# Altium PCB Routed BOARD 2.pcbdoc (part 2 of 2)
Units mil, origin at the board's own origin, x right, y up, seen from the top; angles counter-clockwise.
Board outline 6425 x 5035 mil, 2 copper layers (TopLayer, BottomLayer); 106 components, 189 nets, 1082 pads, 226 vias.
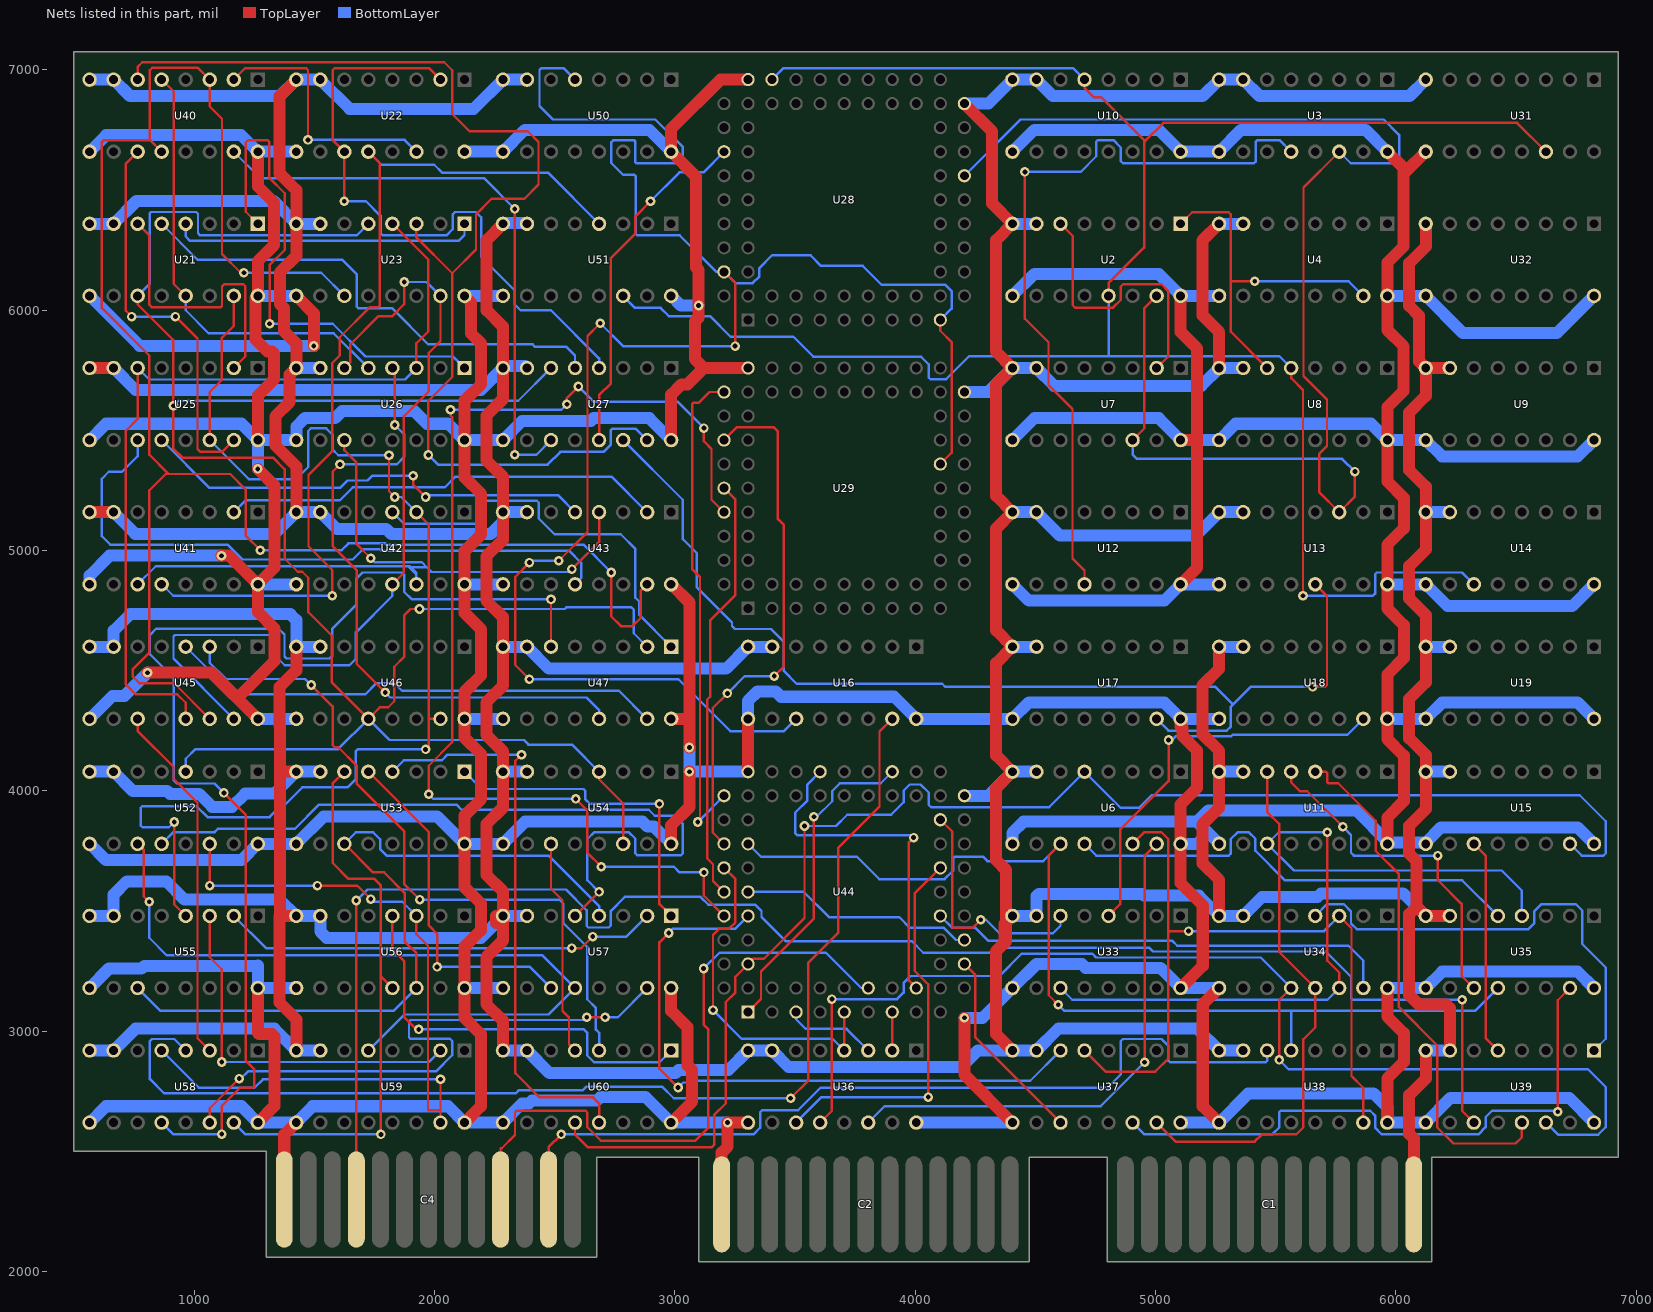
[diagram p2: the nets of this part, all layers, seen from the top]

## Via types
v1: diameter 40, hole 20, TopLayer to BottomLayer, 226 vias

## Nets (pads, with @x,y where several pads share a name; then routed paths per layer and width w, separated by ;. In a path a pad name is that pad's centre, name@x,y a point inside that pad or via, vN(x,y) a via of type N, cw(c..) or ccw(c..) an arc to the next point about the centre after c; other vN are vias at no path point) (continued)
$$$BCBFJ: U26.9 U41.9 U42.12 U43.4 | length 3055
  TopLayer w10: U26.9@1625,5460 1625,5418 1674,5369 1674,5029 v1(1735,4968) ; v1(2572,4923) 2685,5036 U43.4@2685,5160
  BottomLayer w10: U41.9@765,4860 840,4935 1898,4935 1902,4931 ; v1(1735,4968) 1751,4952 1947,4952 1968,4931 ; 1894.05,4930.95 1925,4900 ; 1894.05,4931 1902,4931 ; U42.12@1925,4860 1925,4900 ; v1(2572,4923) 2560,4911 1988,4911 1968,4931 ; 1902,4931 1968,4931 ; 1902,4931 1925,4908 1925,4900
$$$BCJFD: U53.9 U55.9 U56.12 U57.4 | length 3262.6
  TopLayer w10: U53.9@1625,3780 1744,3661 1791,3661 1876,3576 1876,3374 1925,3325 U56.12@1925,3180
  BottomLayer w10: U55.9@765,3180 860,3085 1830,3085 U56.12@1925,3180 ; U53.9@1625,3780 1673,3828 1745,3828 1774,3799 1774,3758 1801,3731 2475,3731 2685,3521 U57.4@2685,3480
$$$BDDHF: U34.10 U36.10 U39.12 | length 4781.3
  TopLayer w10: U36.10@3605,2620 3654,2669 v1(3654,3134) ; v1(5515,2881) 5515,3130 U34.10@5565,3180
  BottomLayer w10: v1(3654,3134) 3925,3134 3952,3161 3952,3201 3981,3230 4351,3230 4444,3323 4737,3323 4753,3307 5438,3307 U34.10@5565,3180 ; v1(5515,2881) 5554,2842 6800,2842 6874,2768 6874,2601 6843,2570 6675,2570 U39.12@6625,2620
$$$BDEIJ: U25.10 U43.5 | length 1914.8
  TopLayer w10: v1(1911,5312) 1911,5275 v1(1963,5223)
  BottomLayer w10: U25.10@865,5460 1064,5261 1607,5261 1638,5292 1722,5292 1742,5312 v1(1911,5312) ; v1(1963,5223) 1971,5231 2514,5231 U43.5@2585,5160
$$$BDHEB: U55.2 U57.2 | length 1831
  TopLayer w10: v1(2571,3346) 2611,3346 v1(2659,3394)
  BottomLayer w10: U55.2@1165,3480 1299,3346 v1(2571,3346) ; v1(2659,3394) 2799,3394 U57.2@2885,3480
$$$BEBDJ: U23.13 U26.6 U42.11 U45.13 | length 3639.9
  TopLayer w10: U26.6@1625,5760 1650,5785 1650,5859 1767,5976 1825,5976 1874,6025 v1(1874,6118) ; U42.11@1825,4860 1873,4908 1873,5559 1976,5662 1976,5823 2025,5872 U23.13@2025,6060
  BottomLayer w10: U45.13@1165,4300 914,4551 914,4642 921,4649 1324,4649 1350,4623 1350,4550 1377,4523 1646,4523 1673,4550 1673,4660 1825,4812 U42.11@1825,4860 ; v1(1874,6118) 1967,6118 U23.13@2025,6060
$$$BGACF: U26.4 U47.11 | length 2679.9
  TopLayer w10: v1(1607,5359) 1576,5328 1576,5019 1676,4919 1676,4529 v1(1795,4410) ; U26.4@1825,5760 1835,5750 v1(1835,5523)
  BottomLayer w10: v1(1607,5359) 1843,5359 1874,5390 1874,5484 v1(1835,5523) ; v1(1795,4410) 1816,4389 2633,4389 2685,4337 U47.11@2685,4300
$$$BGGBC: U34.4 U39.1 | length 1930.1
  BottomLayer w10: U34.4@5665,3480 5714,3529 5784,3529 5814,3499 5814,3449 5838,3425 6552,3425 6576,3449 6576,3499 6606,3529 6749,3529 6776,3502 6776,3363 6874,3265 6874,2969 U39.1@6825,2920
$$$BHEJI: U34.13 U44.25 | length 1951
  BottomLayer w10: U44.25@4105,3480 4155,3430 4251,3430 4305,3376 5071,3376 5091,3356 5803,3356 5865,3294 U34.13@5865,3180
$$$BIABB: U35.13 U37.12 | length 2538.2
  TopLayer w10: v1(6674,2665) 6674,3129 U35.13@6725,3180
  BottomLayer w10: U37.12@4905,2620 4953,2572 5487,2572 5515,2600 5515,2663 5521,2669 5894,2669 5914,2649 5914,2599 5942,2571 6344,2571 6374,2601 6374,2642 6401,2669 6670,2669 v1(6674,2665)
$$$CAHGG: U11.6 U34.11 U37.13 | length 2250.7
  TopLayer w10: U37.13@5005,2620 5084,2541 5413,2541 5443,2571 5586,2571 5615,2600 5615,2966 5665,3016 U34.11@5665,3180 5515,3330 5515,3863 5465,3913 U11.6@5465,4080
$$$CBCHE: U53.1 U57.1 | length 1373.3
  TopLayer w10: v1(2936,3946) 2936,3529 U57.1@2985,3480
  BottomLayer w10: U53.1@2125,4080 2197,4008 2620,4008 2627,4001 2627,3966 2647,3946 v1(2936,3946)
$$$CGIGD: U23.3 U27.13 U40.6 | length 4856.4
  TopLayer w10: U40.6@765,6960 765,7013 784,7032 2041,7032 2074,6999 2074,6817 2146,6745 2388,6745 2433,6700 2433,6523 2374,6464 2238,6464 2173,6399 2173,6253 2074,6154 ; U23.3@1925,6360 1925,6303 2074,6154 ; v1(1975,5398) 1975,5624 2074,5723 2074,6154
  BottomLayer w10: v1(1975,5398) 2015,5358 2471,5358 2524,5411 2704,5411 2734,5441 2734,5502 2740,5508 2837,5508 U27.13@2885,5460
$$$CIDID: U55.3 U59.2 | length 1558.6
  TopLayer w10: U55.3@1065,3480 1065,3308 1115,3258 v1(1115,2872)
  BottomLayer w10: v1(1115,2872) 1977,2872 U59.2@2025,2920
$$$DAIED: U6.10 U35.5 | length 1989.9
  BottomLayer w10: U6.10@4705,3780 4754,3731 5305,3731 5313,3739 5313,3799 5343,3829 5388,3829 5416,3801 5416,3751 5539,3628 6277,3628 U35.5@6425,3480
$$$DCCJI: U25.9 U43.10 | length 2670.3
  BottomLayer w10: U25.9@765,5460 765,5393 700,5328 645,5328 616,5299 616,5060 651,5025 1139,5025 1201,4963 1660,4963 1703,5006 1773,5006 1779,5000 2560,5000 2611,4949 2611,4886 U43.10@2585,4860
$$$DFGAI: U42.4 U47.1 | length 1698.8
  BottomLayer w10: U42.4@1825,5160 1873,5112 2180,5112 2185,5117 2185,5182 2211,5208 2425,5208 2434,5199 2434,5134 2500,5068 2775,5068 2836,5007 2836,4804 2853,4787 2853,4732 U47.1@2985,4600
$$$DJABJ: U52.9 U57.10 U59.5 | length 3237.1
  TopLayer w10: U52.9@765,3780 790,3755 790,3562 v1(813,3539)
  BottomLayer w10: v1(813,3539) 813,3389 886,3316 2449,3316 U57.10@2585,3180 2475,3070 1875,3070 U59.5@1725,2920
$$$EABFC: U6.12 U34.3 U37.5 U38.13 | length 3143
  TopLayer w10: U37.5@4705,2920 4793,2832 4999,2832 5054,2887 5054,3411 ; U6.12@4905,3780 4954,3829 5024,3829 5054,3799 5054,3411 ; v1(5138,3417) 5060,3417 5054,3411 ; U34.3@5765,3480 5816,3429 5816,2814 5865,2765 U38.13@5865,2620
  BottomLayer w10: v1(5138,3417) 5702,3417 U34.3@5765,3480
$$$EAGCC: U6.13 U36.12 | length 2183.7
  TopLayer w10: v1(4955,2871) 4955,3730 U6.13@5005,3780
  BottomLayer w10: U36.12@3805,2620 3873,2688 4772,2688 v1(4955,2871)
$$$EDCCF: U21.6 U25.2 | length 1212.1
  TopLayer w10: U21.6@765,6360 814,6311 814,6023 825,6012 1110,6012 1116,6018 1116,6099 1126,6109 1204,6109 1213,6100 1213,5808 U25.2@1165,5760
$$$EEFFB: U21.5 U27.5 | length 2078.1
  BottomLayer w10: U21.5@865,6360 1015,6210 1617,6210 1676,6151 1676,6016 1683,6009 1823,6009 1974,5858 2409,5858 2419,5848 2549,5848 2585,5812 U27.5@2585,5760
$$$EJDID: U45.9 U58.3 | length 1504.3
  TopLayer w10: U45.9@765,4300 765,4250 914,4101 914,4051 1014,3951 1014,2971 U58.3@1065,2920
$$$FBEJC: U53.4 U60.11 | length 2383.4
  TopLayer w10: v1(2362,4151) 2336,4125 2336,2826 2437,2725 2660,2725 2685,2700 U60.11@2685,2620
  BottomLayer w10: U53.4@1825,4080 1873,4128 2031,4128 2054,4151 v1(2362,4151)
$$$FCEDE: U44.1 U44.39 | length 1355.1
  TopLayer w10: U44.1@3305,3080 3359,3134 3359,3249 3579,3469 v1(3579,3893)
  BottomLayer w10: v1(3579,3893) 3591,3893 3655,3957 3655,4000 3687,4032 3857,4032 U44.39@3905,4080
$$$FDEBH: U37.9 U44.20 | length 825.7
  TopLayer w10: U44.20@4205,3280 4251,3234 4251,2974 U37.9@4605,2620
$$$FEBDG: U36.9 U44.29 | length 1615.8
  TopLayer w10: v1(4055,2726) 4055,3195 3998,3252 3998,3573 U44.29@4105,3680
  BottomLayer w10: U36.9@3505,2620 3611,2726 v1(4055,2726)
$$$FEIEE: U21.1 U26.1 | length 2160
  TopLayer w10: U21.1@1265,6360 1215,6410 1215,6698 1225,6708 1305,6708 1313,6700 1313,6551 1377,6487 1377,6251 1314,6188 v1(1314,5944)
  BottomLayer w10: v1(1314,5944) 1577,5944 1713,5808 2077,5808 U26.1@2125,5760
$$$FFCEC: U57.13 U58.12 | length 2519.7
  TopLayer w10: U58.12@1065,2620 1065,2680 v1(1188,2803) ; v1(2634,3058) v1(2710,3058)
  BottomLayer w10: v1(1188,2803) 1194,2803 1224,2833 2006,2833 2074,2901 2074,2959 2064,2969 1899,2969 1894,2974 1894,3040 1901,3047 2623,3047 v1(2634,3058) ; v1(2710,3058) 2763,3058 U57.13@2885,3180
$$$FGBCC: U37.6 U44.63 | length 2705.7
  TopLayer w10: v1(2975,3409) 2936,3370 2936,2844 v1(3014,2766)
  BottomLayer w10: v1(2975,3409) 2993,3427 3252,3427 U44.63@3305,3480 ; v1(3014,2766) 3035,2787 3089,2787 3096,2794 4479,2794 U37.6@4605,2920
$$$FGBCD: U33.6 U44.33 | length 1008.9
  TopLayer w10: U44.33@4105,3880 4155,3830 4155,3435 4160,3430 4239,3430 v1(4273,3464)
  BottomLayer w10: v1(4273,3464) 4295,3464 4351,3408 4574,3408 4605,3439 U33.6@4605,3480
$$$FIBII: U53.6 U56.11 U58.13 | length 2375.4
  TopLayer w10: U53.6@1625,4080 1576,4031 1576,3701 1643,3634 1750,3634 1776,3608 1776,3229 1777,3228 ; v1(1777,2571) 1777,3228 ; U56.11@1825,3180 1777,3228
  BottomLayer w10: U58.13@1165,2620 1214,2571 v1(1777,2571)
$$$FJAFH: U21.4 U23.1 | length 1276.8
  BottomLayer w10: U21.4@965,6360 965,6307 983,6289 2100,6289 2125,6314 U23.1@2125,6360
$$$FJIDJ: U36.4 U44.9 U44.58 | length 1449
  TopLayer w10: v1(3159,3088) 3159,3400 3186,3427 3226,3427 3252,3453 3252,3633 U44.58@3205,3680 ; U36.4@3705,2920 U44.9@3705,3080
  BottomLayer w10: v1(3159,3088) 3278,2969 3656,2969 U36.4@3705,2920
$$$GAGIB: U52.12 U56.3 U58.5 U59.13 | length 3384.8
  TopLayer w10: v1(1065,3606) U52.12@1065,3780 ; v1(1513,3606) 1679,3606 v1(1735,3550) ; U56.3@1925,3480 1925,3404 1973,3356 1973,2672 2025,2672 ; U59.13@2025,2620 2025,2672 ; v1(2025,2800) 2025,2672
  BottomLayer w10: U58.5@865,2920 1020,2765 1251,2765 1286,2800 v1(2025,2800) ; v1(1065,3606) v1(1513,3606) ; v1(1735,3550) 1746,3539 1866,3539 U56.3@1925,3480
$$$GEDBF: U52.10 U57.5 | length 3261.9
  TopLayer w10: U57.5@2585,3480 v1(2685,3580)
  BottomLayer w10: U52.10@865,3780 914,3829 1085,3829 1098,3842 1419,3842 1520,3943 2092,3943 2113,3922 2892,3922 2917,3897 3000,3897 3034,3863 3034,3741 3025,3732 2845,3732 2836,3741 2836,3801 2808,3829 2666,3829 2636,3799 2636,3629 v1(2685,3580)
$$$GEECJ: C4.19 U44.12 | length 2751.2
  TopLayer w10: C4.19@2275,2300 2275,2513 2280,2513 2335,2568 2335,2663 2341,2669 2629,2669 2636,2662 2636,2601 2692,2545 3086,2545 3140,2599 3140,3008 3120,3028 v1(3120,3261)
  BottomLayer w10: v1(3120,3261) 3186,3327 3629,3327 3776,3180 U44.12@3805,3180
$$$GGBFA: U11.5 U35.9 | length 1437.4
  TopLayer w10: U11.5@5565,4080 5565,4035 5601,3999 5632,3999 v1(5780,3851) ; v1(6175,3731) 6175,3629 6274,3530 6274,3231 U35.9@6325,3180
  BottomLayer w10: v1(5780,3851) 5814,3817 5814,3743 5826,3731 v1(6175,3731)
$$$GGEHJ: U21.11 U26.5 U40.5 | length 1860.8
  TopLayer w10: U40.5@865,6960 915,6910 915,6110 U21.11@965,6060
  BottomLayer w10: U21.11@965,6060 965,6000 1061,5904 1581,5904 U26.5@1725,5760
$$$GHCAI: U56.4 U60.1 | length 1706.1
  TopLayer w10: U56.4@1825,3480 1825,3341 1875,3291 1875,3058 1925,3008 v1(1935,3008)
  BottomLayer w10: v1(1935,3008) 2622,3008 2635,2995 2635,2900 2664,2871 2936,2871 U60.1@2985,2920
$$$HAFJG: U15.9 U39.5 | length 901.4
  TopLayer w10: U15.9@6325,3780 6375,3730 6375,2970 U39.5@6425,2920
$$$HBAEF: U36.2 U44.13 | length 160
  TopLayer w10: U36.2@3905,2920 U44.13@3905,3080
$$$HBEHJ: U44.16 U44.45 | length 1446.1
  TopLayer w10: v1(3994,3806) 3974,3786 3974,3211 U44.16@4005,3180
  BottomLayer w10: U44.45@3605,4080 3552,4027 3552,3960 3501,3909 3501,3825 3511,3815 3985,3815 v1(3994,3806)
$$$HBFJD: U41.2 U43.2 | length 1842.6
  BottomLayer w10: U41.2@1165,5160 1214,5209 1606,5209 1660,5263 2043,5263 2088,5308 2737,5308 U43.2@2885,5160
$$$HBJHI: U6.9 U35.10 U38.5 U44.57 | length 4218
  TopLayer w10: v1(4596,3110) 4556,3150 4556,3731 U6.9@4605,3780
  BottomLayer w10: U44.57@3305,3780 3359,3726 3758,3726 3851,3633 4123,3633 4158,3668 4158,3719 4166,3727 4282,3727 4301,3708 4533,3708 U6.9@4605,3780 ; v1(4596,3110) 4621,3085 5565,3085 ; U38.5@5565,2920 5565,3085 ; U35.10@6425,3180 6330,3085 5565,3085
$$$HECHG: C4.7 U39.9 | length 6847.3
  TopLayer w10: C4.7@1675,2300 v1(1675,3544) ; v1(6276,3131) 6276,2669 U39.9@6325,2620
  BottomLayer w10: v1(1675,3544) 1721,3590 2547,3590 2634,3503 2634,3438 2640,3432 2725,3432 2734,3441 2734,3501 2792,3559 3107,3559 3139,3527 3334,3527 3361,3500 3361,3475 3461,3375 3986,3375 4034,3327 4309,3327 4329,3347 4975,3347 4990,3332 5709,3332 5814,3227 5814,3138 5821,3131 v1(6276,3131)
$$$HJJIF: U45.3 U60.4 | length 2892.9
  TopLayer w10: v1(1487,4441) 1576,4352 1576,4191 1585,4182 1600,4182 1676,4106 1676,4031 1874,3833 1874,3613 v1(1939,3548)
  BottomLayer w10: U45.3@1065,4600 1065,4533 1132,4466 1462,4466 v1(1487,4441) ; v1(1939,3548) 2519,3548 2536,3531 2536,3451 2636,3351 2636,3133 2672,3097 2672,3007 2685,2994 U60.4@2685,2920
$$$ICCJI: U47.6 U58.10 | length 5054.4
  TopLayer w10: v1(1115,2572) 1115,2689 1191,2765 1246,2765 1251,2770 1251,2841 1214,2878 1214,3902 v1(1124,3992) ; U47.6@2485,4600 v1(2485,4797)
  BottomLayer w10: U58.10@865,2620 914,2571 1114,2571 v1(1115,2572) ; v1(1124,3992) 1085,4031 929,4031 916,4044 916,4469 816,4569 816,4649 842,4675 1352,4675 1376,4651 1376,4560 1385,4551 1564,4551 1574,4561 1574,4674 1674,4774 1674,4882 1701,4909 1864,4909 1874,4899 1874,4829 1906,4797 v1(2485,4797)
$$$IDHGA: U53.5 U57.9 | length 1440.9
  TopLayer w10: U53.5@1725,4080 1977,3828 1977,3440 2011,3406 v1(2011,3268)
  BottomLayer w10: v1(2011,3268) 2397,3268 U57.9@2485,3180
$$$IEHDA: U44.22 U44.61 | length 982.8
  BottomLayer w10: U44.61@3305,3580 3537,3580 3642,3475 3934,3475 3979,3430 4120,3430 4170,3380 U44.22@4205,3380
$$$IFBFJ: U23.9 U40.3 U40.10 U43.13 U45.12 | length 7600
  TopLayer w10: U40.10@865,6660 817,6708 816,6708 ; U45.12@1065,4300 917,4448 772,4448 745,4475 745,4507 814,4576 814,5251 882,5319 894,5319 ; v1(1207,6156) 1194,6156 1116,6234 1116,6797 1065,6848 U40.3@1065,6960 1016,7009 826,7009 816,6999 816,6708 ; v1(1275,5002) 1214,5063 1214,5255 1150,5319 894,5319 ; v1(2736,4909) 2736,4726 2776,4686 2824,4686 2859,4721 2859,4834 U43.13@2885,4860 ; 816,6708 625,6708 616,6699 616,6009 814,5811 814,5399 894,5319
  BottomLayer w10: v1(1207,6156) 1529,6156 U23.9@1625,6060 ; v1(1275,5002) 1614,5002 1642,5030 1795,5030 1800,5025 2620,5025 v1(2736,4909)
$$$IFGFD: U36.3 U44.5 | length 383.8
  BottomLayer w10: U44.5@3505,3080 3505,3050 3545,3010 3715,3010 U36.3@3805,2920
$$$IHIFF: U11.4 U39.11 | length 2192.3
  TopLayer w10: U11.4@5665,4080 5710,4080 5715,4075 5715,4037 5720,4032 5761,4032 5917,3876 5917,3750 6013,3654 6013,3101 6173,2941 6173,2600 6240,2533 6499,2533 6525,2559 U39.11@6525,2620
$$$JAAAJ: U25.13 U40.9 | length 1663.6
  TopLayer w10: v1(740,5974) 716,5998 716,6611 U40.9@765,6660 ; v1(922,5974) 1014,5882 1014,5423 1026,5411 1116,5411 U25.13@1165,5460
  BottomLayer w10: v1(740,5974) v1(922,5974)
$$$JADED: U11.9 U33.9 U34.12 U35.4 | length 3385
  TopLayer w10: v1(5715,3828) 5715,3294 5765,3244 U34.12@5765,3180
  BottomLayer w10: U33.9@4605,3180 4654,3131 5716,3131 U34.12@5765,3180 ; v1(5715,3828) 5513,3828 U11.9@5465,3780 5576,3669 6441,3669 6525,3585 U35.4@6525,3480
$$$JBGJA: U22.10 U41.10 U51.4 | length 3866.6
  TopLayer w10: v1(1575,4812) 1575,4919 1476,5018 1476,5315 1574,5413 1574,5780 1606,5812 1606,5888 1730,6012 1765,6012 1773,6020 1773,6612 U22.10@1725,6660
  BottomLayer w10: U41.10@865,4860 913,4812 v1(1575,4812) ; U22.10@1725,6660 1779,6606 1999,6606 2032,6573 2472,6573 U51.4@2685,6360
$$$JGABC: U54.9 U60.5 | length 901.4
  TopLayer w10: U54.9@2485,3780 2485,3593 2533,3545 2533,3085 2560,3058 2560,2945 U60.5@2585,2920
$$$JHDFD: C4.23 U38.6 | length 3635.3
  TopLayer w10: C4.23@2475,2300 2475,2518 v1(2528,2571)
  BottomLayer w10: v1(2528,2571) 3328,2571 3356,2599 3356,2664 3364,2672 3514,2672 3607,2765 4801,2765 4856,2820 4856,2959 4865,2968 5025,2968 5054,2939 5054,2878 5061,2871 5459,2871 5465,2877 U38.6@5465,2920
$$$JJFCI: U27.9 U40.13 | length 2466.8
  TopLayer w10: v1(2334,5399) v1(2334,6422)
  BottomLayer w10: U40.13@1165,6660 1275,6550 2206,6550 v1(2334,6422) ; v1(2334,5399) 2424,5399 U27.9@2485,5460
CD: U27.11 U28.56 | length 1474
  TopLayer w10: U27.11@2685,5460 2685,5647 2734,5696 2734,6217 2836,6319 2836,6391 v1(2899,6454)
  BottomLayer w10: v1(2899,6454) 3019,6574 3119,6574 U28.56@3205,6660
E: U29.60 U44.60 | length 1776.9
  TopLayer w10: U44.60@3205,3580 3159,3626 3159,3695 3135,3719 3135,4380 3147,4392 3147,4710 3252,4815 3252,5213 U29.60@3205,5260
FR: U16.9 U28.17 U28.66 U29.29 U50.5 | length 8069.7
  TopLayer w10: v1(2395,4465) 2336,4524 2336,4891 v1(2395,4950) ; v1(2517,4958) 2637,5078 2637,5893 v1(2690,5946) ; U28.66@3205,6160 3252,6113 3252,5852 v1(3251,5851) ; U29.29@4105,5360 4152,5407 4152,5868 4105,5915 U28.17@4105,5960
  BottomLayer w10: v1(2395,4465) 3015,4465 3231,4249 3454,4249 U16.9@3505,4300 ; v1(2395,4950) 2403,4958 v1(2517,4958) ; U50.5@2585,6960 2537,7008 2445,7008 2437,7000 2437,6850 2493,6794 2919,6794 3034,6679 3034,6621 3025,6612 2840,6612 2835,6617 2835,6703 2830,6708 2745,6708 2736,6699 2736,6613 2785,6564 2832,6564 2837,6559 2837,6319 2844,6312 3021,6312 3173,6160 U28.66@3205,6160 3252,6113 3324,6113 3352,6141 3352,6176 3405,6229 3565,6229 3609,6185 3782,6185 3861,6106 4126,6106 4152,6080 4152,6007 U28.17@4105,5960 ; v1(2690,5946) 2785,5851 v1(3251,5851)
FW: U45.4 U47.13 | length 2083.2
  BottomLayer w10: U45.4@965,4600 1163,4402 1712,4402 1759,4449 1833,4449 1865,4417 2768,4417 U47.13@2885,4300
GND: C2.1 C4.1 C6.1 C7.1 C8.1 C10.1 C11.1 C12.1 C13.1 C14.1 C15.1 C16.1 C17.1 C18.1 C19.1 C20.1 C21.1 C22.1 C23.1 C26.1 C27.1 C28.1 C29.1 C30.1 C31.1 C32.1 C33.1 C34.1 C35.1 C36.1 C37.1 C38.1 C39.1 C40.1 C41.1 C42.1 C43.1 C48.1 C49.1 C55.1 C57.1 C58.1 C59.1 C60.1 C64.1 C66.1 C67.1 C68.1 C69.1 C70.1 C72.1 C73.1 U2.14 U3.14 U4.14 U6.14 U7.14 U8.14 U9.14 U10.14 U11.14 U12.14 U13.14 U14.14 U15.14 U16.14 U17.14 U18.14 U19.14 U21.14 U22.14 U23.14 U25.14 U26.14 U27.14 U28.51 U29.51 U32.14 U33.14 U34.14 U35.14 U36.14 U37.14 U38.14 U39.14 U40.14 U41.14 U42.14 U43.14 U44.51 U45.14 U46.14 U47.14 U50.14 U51.14 U52.14 U53.14 U54.14 U55.14 U56.14 U57.14 U58.14 U59.14 U60.14 | length 53456
  TopLayer w50: v1(806,4492) 807,4493 1072,4493 U45.14@1265,4300 ; v1(1114,4979) 1146,4979 U41.14@1265,4860 ; 1179.5,4385.5 1334,4540 1334,4676 1265,4745 U41.14@1265,4860 ; U58.14@1265,2620 1334,2689 1334,2979 1325,2988 1270,2988 1265,2993 U55.14@1265,3180 ; v1(1265,5340) 1334,5271 1334,4929 U41.14@1265,4860 ; U25.14@1265,5460 1265,5645 1333,5713 1333,5820 1325,5828 1306,5828 1256,5878 1256,6051 U21.14@1265,6060 1265,6204 1333,6272 1333,6448 1265,6516 U40.14@1265,6660 ; C4.1@1375,2300 1375,2570 C35.1@1425,2620 ; C22.1@1425,6060 1498,5987 v1(1498,5852) ; U59.14@2125,2620 2193,2688 2193,2988 2125,3056 U56.14@2125,3180 2125,3352 2193,3420 2193,3532 2125,3600 U53.14@2125,3780 2125,3897 2194,3966 2194,4153 2125,4222 U46.14@2125,4300 2125,4412 2194,4481 2194,4672 2125,4741 U42.14@2125,4860 2125,4998 2194,5067 2194,5236 2125,5305 U26.14@2125,5460 2125,5624 2194,5693 2194,5862 2153,5903 2153,6032 U23.14@2125,6060 ; U60.14@2985,2620 3072,2707 3072,2839 3053,2858 3053,3017 2985,3085 U57.14@2985,3180 ; U54.14@2985,3780 2985,3857 3061,3933 v1(3061,4080) ; U47.14@2985,4300 3061,4300 ; U43.14@2985,4860 3061,4784 v1(3061,4181) ; U27.14@2985,5460 2985,5649 3028,5692 3053,5692 3121,5760 ; v1(3099,6020) 3099,5969 3084,5954 3084,5797 3121,5760 ; v1(3099,6021) 3099,6168 3088,6179 3088,6557 U50.14@2985,6660 2985,6755 3190,6960 U28.51@3305,6960 ; C2.1@3195,2280 3195,2495 3220,2520 v1(3220,2620) C10.1@3305,2620 ; U44.51@3305,4080 C48.1@3305,4300 ; U29.51@3305,5760 3121,5760 ; v1(4205,3056) 4205,2820 C13.1@4405,2620 ; U33.14@5105,3180 5197,3272 5197,3524 5105,3616 U6.14@5105,3780 5105,3944 5174,4013 5174,4168 5113,4229 5113,4261 5105,4269 U17.14@5105,4300 ; U12.14@5105,4860 5174,4929 5174,5460 ; U7.14@5105,5460 5174,5460 ; U2.14@5105,6060 5105,5910 5174,5841 5174,5460 ; C11.1@5265,2620 5197,2688 5197,3112 C17.1@5265,3180 ; U38.14@5965,2620 5965,2804 6034,2873 6034,2992 5965,3061 U34.14@5965,3180 ; U11.14@5965,3780 5965,3889 6034,3958 6034,4147 5965,4216 U18.14@5965,4300 5965,4484 6034,4553 6034,4690 5965,4759 U13.14@5965,4860 5965,5024 6034,5093 6034,5219 5965,5288 U8.14@5965,5460 5965,5597 6033,5665 6033,5850 5965,5918 U4.14@5965,6060 5965,6198 6033,6266 6033,6592 ; U3.14@5965,6660 6033,6592 ; C72.1@6125,6660 6045,6580 6033,6592
  BottomLayer w50: C37.1@565,2620 633,2688 1197,2688 U58.14@1265,2620 C35.1@1425,2620 1493,2688 2057,2688 U59.14@2125,2620 C40.1@2285,2620 2365,2700 2394,2700 2405,2711 2675,2711 2690,2726 2879,2726 U60.14@2985,2620 v1(3220,2620) ; C38.1@565,3180 646,3261 782,3261 793,3272 1265,3272 ; C39.1@565,3780 633,3712 1197,3712 U52.14@1265,3780 C36.1@1425,3780 1539,3894 2011,3894 U53.14@2125,3780 C34.1@2285,3780 2377,3872 2866,3872 2886,3852 2913,3852 U54.14@2985,3780 ; C20.1@565,4300 661,4396 710,4396 v1(806,4492) ; C27.1@565,4860 565,4896 648,4979 v1(1114,4979) ; C28.1@565,5460 633,5528 1197,5528 U25.14@1265,5460 ; C21.1@565,6060 773,5852 v1(1498,5852) ; C26.1@565,6660 634,6729 1196,6729 U40.14@1265,6660 ; U40.14@1260,6660 C33.1@1425,6660 ; 1264,3272 1265,3273 U55.14@1265,3180 C41.1@1425,3180 ; U45.14@1265,4300 C7.1@1425,4300 ; U41.14@1265,4860 C30.1@1425,4860 ; v1(1265,5340) U25.14@1265,5460 ; U21.14@1265,6060 C22.1@1425,6060 ; U23.14@2120,6060 C23.1@2285,6060 ; U56.14@2125,3180 C43.1@2285,3180 ; U46.14@2125,4300 C29.1@2285,4300 ; U42.14@2125,4860 C31.1@2285,4860 ; U22.14@2125,6660 C32.1@2285,6660 2376,6751 2894,6751 U50.14@2985,6660 ; U27.14@2985,5460 2894,5551 2662,5551 2651,5540 2365,5540 C6.1@2285,5460 U26.14@2125,5460 2057,5528 1969,5528 1916,5581 1616,5581 1587,5552 1461,5552 1425,5516 C19.1@1425,5460 U25.14@1265,5460 ; U51.14@2985,6060 3025,6020 v1(3099,6020) 3098,6021 v1(3099,6021) ; v1@3061,4182 v1(3061,4080) U44.51@3305,4080 ; C48.1@3305,4300 3305,4375 3344,4414 3420,4414 3442,4392 3913,4392 U16.14@4005,4300 C57.1@4405,4300 4473,4368 5037,4368 U17.14@5105,4300 C49.1@5265,4300 ; U36.14@4005,2620 C13.1@4405,2620 ; v1(4205,3056) 4281,3056 C14.1@4405,3180 4505,3280 4694,3280 4710,3264 5021,3264 U33.14@5105,3180 C17.1@5265,3180 ; C15.1@4405,3780 4405,3826 4451,3872 5173,3872 ; C66.1@4405,4860 4473,4792 5037,4792 U12.14@5105,4860 C69.1@5265,4860 ; C67.1@4405,5460 4496,5551 5014,5551 U7.14@5105,5460 C55.1@5265,5460 5333,5528 5897,5528 U8.14@5965,5460 C42.1@6125,5460 6193,5392 6757,5392 U9.14@6825,5460 ; C58.1@4405,6060 4496,6151 5014,6151 U2.14@5105,6060 C59.1@5265,6060 ; C64.1@4405,6660 4496,6751 5014,6751 U10.14@5105,6660 C73.1@5265,6660 5356,6751 5874,6751 U3.14@5965,6660 ; U37.14@5105,2620 C11.1@5265,2620 5386,2741 5908,2741 5965,2684 U38.14@5965,2620 C16.1@6125,2620 6228,2723 6722,2723 U39.14@6825,2620 ; U6.14@5105,3780 5174,3780 5219.5,3825.5 ; C12.1@5265,3780 5173,3872 ; U34.14@5965,3180 C18.1@6125,3180 6193,3248 6757,3248 U35.14@6825,3180 ; U18.14@5965,4300 C68.1@6125,4300 6193,4368 6757,4368 U19.14@6825,4300 ; U13.14@5965,4860 C70.1@6125,4860 6216,4769 6734,4769 U14.14@6825,4860 ; U4.14@5965,6060 C60.1@6125,6060 6280,5905 6670,5905 U32.14@6825,6060 ; U15.14@6825,3780 6757,3848 6188,3848 6125,3785 5970,3785 5836,3919 5220,3919 5173,3872
GT: U22.12 U40.2 | length 1093.9
  TopLayer w10: U40.2@1165,6960 1213,7008 1465,7008 1474,6999 v1(1474,6709)
  BottomLayer w10: v1(1474,6709) 1876,6709 U22.12@1925,6660
GY: U21.9 U23.5 U27.6 U46.10 U47.2 U52.4 U54.4 U54.12 | length 9622.9
  TopLayer w10: U21.9@765,6060 765,6025 913,5877 ; v1(914,5603) 914,5876 913,5877 ; v1(1938,4757) 1900,4757 1875,4732 1875,4559 1833,4517 1833,4373 1808,4348 1773,4348 U46.10@1725,4300 1573,4452 1573,4646 1475,4744 1475,4887 1450,4912 1431,4912 1377,4966 1377,5338 1328,5387 951,5387 913,5425 913,5603 913,5877 ; U54.4@2685,4080 2685,4049 2785,3949 U54.12@2785,3780
  BottomLayer w10: U21.9@765,6060 815,6110 815,6403 821,6409 1009,6409 1016,6402 1016,6321 1025,6312 1677,6312 U23.5@1725,6360 ; v1(914,5603) 935,5624 2349,5624 U27.6@2485,5760 ; U52.4@965,4080 965,4134 1005,4174 1599,4174 U46.10@1725,4300 1813,4212 2372,4212 2391,4193 2572,4193 U54.4@2685,4080 ; v1(1938,4757) 2542,4757 2549,4764 2820,4764 2829,4755 2829,4656 U47.2@2885,4600
HY: U18.13 U33.4 | length 1682
  TopLayer w10: U33.4@4805,3480 4854,3529 4854,3840 5055,4041 v1(5055,4212)
  BottomLayer w10: v1(5055,4212) 5070,4212 5086,4228 5315,4228 5321,4234 5799,4234 U18.13@5865,4300
IU: U6.5 U15.13 U44.67 U60.10 | length 6160.8
  TopLayer w10: U60.10@2585,2620 2585,2571 2639,2517 3153,2517 3165,2529 3165,2653 3212,2700 3212,3122 3252,3162 3252,3227 3327,3302 3371,3302 3540,3471 v1(3540,3854)
  BottomLayer w10: v1(3540,3854) 3671,3854 3718,3901 3900,3901 3952,3953 3952,4001 3978,4027 4023,4027 4057,3993 4057,3942 4066,3933 4558,3933 U6.5@4705,4080 4855,3930 4932,3930 4984,3982 6766,3982 6874,3874 6874,3741 6864,3731 6774,3731 U15.13@6725,3780
L: U29.52 U44.52 | length 2064.3
  TopLayer w10: v1(3096,3871) 3105,3880 3105,4890 3072,4923 3072,5610 3077,5615 3099,5615 3144,5660 U29.52@3205,5660
  BottomLayer w10: v1(3096,3871) U44.52@3205,3980
NH: U3.10 U12.10 | length 3196.8
  TopLayer w10: v1(4457,6576) 4457,5965 4555,5867 4555,5689 4655,5589 4655,4967 4705,4917 U12.10@4705,4860
  BottomLayer w10: v1(4457,6576) 4689,6576 4754,6641 4754,6702 4760,6708 4825,6708 4856,6677 4856,6621 4865,6612 5410,6612 5417,6619 5417,6700 5425,6708 5517,6708 U3.10@5565,6660
OI: U2.13 U3.12 U7.12 U13.3 U28.28 | length 5816.6
  TopLayer w10: U7.12@4905,5460 4954,5509 4954,6009 U2.13@5005,6060 ; U3.12@5765,6660 5616,6511 5616,5727 5714,5629 5714,5435 5681,5402 5681,5244 U13.3@5765,5160 5830,5225 v1(5830,5329)
  BottomLayer w10: U28.28@4205,6560 4439,6794 5950,6794 6014,6730 6014,6621 6005,6612 5813,6612 U3.12@5765,6660 ; U7.12@4905,5460 4905,5400 4923,5382 5777,5382 v1(5830,5329)
P: U2.11 U8.5 U10.5 U14.9 U28.49 U31.12 U51.12 | length 9228.7
  TopLayer w10: U10.5@4705,6960 4705,6925 4743,6887 4774,6887 4957,6704 ; U2.11@4805,6060 4805,6113 4953,6261 4953,6700 4957,6704 ; U8.5@5565,5760 5565,5718 5614,5669 v1(5614,4812) ; U31.12@6625,6660 6505,6780 5033,6780 4957,6704
  BottomLayer w10: U51.12@2785,6060 2835,6010 2941,6010 2975,5976 3146,5976 3232,5890 3494,5890 3577,5807 4025,5807 4057,5775 4057,5720 4064,5713 4129,5713 4225,5809 4805,5809 ; U28.49@3405,6960 3453,7008 4657,7008 U10.5@4705,6960 ; U2.11@4805,6060 4805,5809 ; U8.5@5565,5760 5516,5809 4805,5809 ; v1(5614,4812) 5905,4812 5914,4821 5914,4902 5921,4909 6276,4909 U14.9@6325,4860
Q: U29.56 U44.56 | length 2194.3
  TopLayer w10: U44.56@3205,3780 3158,3827 3158,4345 v1(3219,4406) ; U29.56@3205,5460 3259,5514 3411,5514 3429,5496 3429,5131 3454,5106 3454,4518 v1(3414,4478)
  BottomLayer w10: v1(3219,4406) 3291,4478 v1(3414,4478)
SE: U22.2 U22.9 U27.4 | length 2697.7
  TopLayer w10: v1(1625,6454) U22.9@1625,6660 1576,6709 1576,6999 1585,7008 1977,7008 U22.2@2025,6960
  BottomLayer w10: v1(1625,6454) 1715,6454 1776,6393 1776,6321 1785,6312 2050,6312 2076,6338 2076,6399 2086,6409 2172,6409 2194,6387 2194,6223 2334,6083 2334,6024 2358,6000 2485,6000 2685,5800 U27.4@2685,5760
UH: U13.11 U17.13 U27.12 | length 4548.5
  TopLayer w10: v1(5654,4433) 5706,4433 5714,4441 5714,4811 U13.11@5665,4860
  BottomLayer w10: U27.12@2785,5460 3033,5212 3033,5048 3092,4989 3092,4847 3238,4701 3238,4686 3250,4674 3400,4674 3454,4620 3454,4499 3507,4446 4113,4446 4126,4433 5250,4433 5323,4360 ; U17.13@5005,4300 5054,4251 5297,4251 5314,4268 5314,4351 5323,4360 ; v1(5654,4433) 5396,4433 5323,4360
VCC: C1.25 C6.2 C7.2 C8.2 C10.2 C11.2 C12.2 C13.2 C14.2 C15.2 C16.2 C17.2 C18.2 C19.2 C20.2 C21.2 C22.2 C23.2 C26.2 C27.2 C28.2 C29.2 C30.2 C31.2 C32.2 C33.2 C34.2 C35.2 C36.2 C37.2 C38.2 C39.2 C40.2 C41.2 C42.2 C43.2 C48.2 C49.2 C55.2 C57.2 C58.2 C59.2 C60.2 C64.2 C66.2 C67.2 C68.2 C69.2 C70.2 C72.2 C73.2 U2.7 U3.7 U4.7 U6.7 U7.7 U8.7 U9.7 U10.7 U11.7 U12.7 U13.7 U14.7 U15.7 U16.7 U17.7 U18.7 U19.7 U21.7 U22.7 U23.7 U25.7 U26.7 U27.7 U28.34 U29.34 U33.7 U34.7 U35.7 U36.7 U37.7 U38.7 U39.7 U40.7 U41.7 U42.7 U43.7 U44.34 U45.7 U46.7 U47.7 U50.7 U51.7 U52.7 U53.7 U54.7 U55.7 U56.7 U57.7 U58.7 U59.7 U60.7 | length 43545.2
  TopLayer w50: C27.2@565,5160 U41.7@665,5160 ; C28.2@565,5760 U25.7@665,5760 ; 1356,4270 1356,4433 1425,4502 C7.2@1425,4600 ; 1357,4080 C36.2@1425,4080 ; 1357,4270 1357,3480 ; C35.2@1425,2920 1425,3050 1356,3119 1356,3479 1357,3480 ; C41.2@1425,3480 1357,3480 ; C30.2@1425,5160 1425,5351 1338,5438 1338,5559 1397,5618 1397,5732 C19.2@1425,5760 1425,5862 1373,5914 1373,6010 1357,6026 1357,6158 1425,6226 C22.2@1425,6360 1425,6500 1356,6569 1356,6891 C33.2@1425,6960 ; C40.2@2285,2920 2285,3044 2216,3113 2216,3309 2285,3378 C43.2@2285,3451 ; C23.2@2285,6360 2217,6292 2217,6000 2285,5932 C6.2@2285,5760 2285,5631 2216,5562 2216,5376 2285,5307 C31.2@2285,5160 2285,5045 2216,4976 2216,4792 2285,4723 C29.2@2285,4600 2285,4438 2216,4369 2216,4233 2285,4164 C34.2@2285,4080 2285,3931 2216,3862 2216,3651 2285,3582 C43.2@2285,3480 ; U28.34@4205,6860 4320,6745 4320,6445 C58.2@4405,6360 4337,6292 4337,5828 C67.2@4405,5760 4337,5692 4337,5228 C66.2@4405,5160 4337,5092 4337,4668 C57.2@4405,4600 4337,4532 4337,4148 C15.2@4405,4080 4337,4012 4337,3712 4378,3671 4378,3480 4378,3453 ; C13.2@4405,2920 4336,2989 4336,3332 4372,3368 ; C14.2@4405,3480 4378,3453 ; C17.2@5265,3480 5265,3630 5196,3699 5196,3861 5265,3930 C12.2@5265,4080 5265,4167 5196,4236 5196,4439 5265,4508 C49.2@5265,4600 ; C55.2@5265,5760 5265,5910 5196,5979 5196,6291 C59.2@5265,6360 ; C1.25@6075,2280 6075,2554 6056,2573 6056,2734 6125,2803 C16.2@6125,2920 ; C60.2@6125,6360 6125,6265 6056,6196 6056,6019 6097,5978 6097,5788 C42.2@6125,5760 ; U39.7@6225,2920 6225,3096 6209,3112 6095,3112 6056,3151 6056,3487 6087,3518 ; U35.7@6225,3480 C18.2@6125,3480 6087,3518 ; U9.7@6225,5760 C42.2@6125,5760 ; C43.2@2270.5,3465.5 C43.2@2285,3480 ; C43.2@2270.5,3465.5 C43.2@2285,3451 ; C43.2@2270.5,3465.5 2256,3480 2256,3451 C43.2@2270.5,3465.5 ; C43.2@2285,3451 C43.2@2285,3480 ; 4372,3368 4378,3374 4378,3453 ; 4372,3368 4372,3447 4378,3453 ; 6087,3518 6087,3708 6056,3739 6056,3855 6125,3924 C8.2@6125,4080 6125,4150 6056,4219 6056,4383 6125,4452 C68.2@6125,4600 6125,4732 6056,4801 6056,4935 6125,5004 C70.2@6125,5160 6125,5266 6056,5335 6056,5575 6125,5644 C42.2@6125,5760
  BottomLayer w50: C37.2@565,2920 U58.7@665,2920 756,3011 1334,3011 C35.2@1425,2920 U59.7@1525,2920 ; C38.2@565,3480 U55.7@665,3480 665,3569 720,3624 884,3624 960,3548 1357,3548 C41.2@1425,3480 U56.7@1525,3480 1525,3415 1551,3389 2194,3389 C43.2@2285,3480 U57.7@2385,3480 ; C39.2@565,4080 U52.7@665,4080 745,4000 887,4000 899,3988 1021,3988 1075,3934 1157,3934 1212,3989 1334,3989 C36.2@1425,4080 U53.7@1525,4080 ; C20.2@565,4600 U45.7@665,4600 665,4667 734,4736 1400,4736 1425,4711 C7.2@1425,4600 U46.7@1525,4600 ; C21.2@565,6360 U21.7@665,6360 760,6455 1330,6455 C22.2@1425,6360 U23.7@1525,6360 ; C26.2@565,6960 U40.7@665,6960 733,6892 1357,6892 C33.2@1425,6960 U22.7@1525,6960 1647,6838 2163,6838 C32.2@2285,6960 U50.7@2385,6960 ; U41.7@665,5160 755,5070 1335,5070 C30.2@1425,5160 U42.7@1525,5160 1594,5091 1799,5091 1821,5069 2234,5069 2285,5120 C31.2@2285,5160 U43.7@2385,5160 ; U25.7@665,5760 757,5668 2193,5668 C6.2@2285,5760 2294,5769 2376,5769 U27.7@2385,5760 ; C19.2@1425,5760 U26.7@1525,5760 ; C40.2@2285,2920 U60.7@2385,2920 2479,2826 3003,2826 3015,2838 3223,2838 C10.2@3305,2920 U36.7@3405,2920 3474,2851 4192,2851 4261,2920 C13.2@4405,2920 U37.7@4505,2920 4596,3011 5174,3011 C11.2@5265,2920 U38.7@5365,2920 ; C34.2@2285,4080 U54.7@2385,4080 ; C29.2@2285,4600 U47.7@2385,4600 2476,4509 3214,4509 C48.2@3305,4600 U16.7@3405,4600 ; C23.2@2285,6360 2289,6364 2381,6364 U51.7@2385,6360 ; U44.34@4205,3980 4305,3980 C15.2@4405,4080 U6.7@4505,4080 ; U29.34@4205,5660 4305,5660 C67.2@4405,5760 U7.7@4505,5760 4579,5686 5191,5686 C55.2@5265,5760 U8.7@5365,5760 ; U28.34@4205,6860 4305,6860 C64.2@4405,6960 U10.7@4505,6960 4573,6892 5081,6892 ; C14.2@4405,3480 U33.7@4505,3480 4505,3562 4515,3572 4945,3572 4953,3564 5181,3564 C17.2@5265,3480 U34.7@5365,3480 5443,3558 5674,3558 5690,3574 6031,3574 C18.2@6125,3480 ; C57.2@4405,4600 U17.7@4505,4600 ; C66.2@4405,5160 U12.7@4505,5160 4602,5063 5168,5063 C69.2@5265,5160 U13.7@5365,5160 ; C58.2@4405,6360 U2.7@4505,6360 ; 5081,6891 5196,6891 C73.2@5265,6960 U3.7@5365,6960 5433,6892 6057,6892 C72.2@6125,6960 ; C12.2@5265,4080 U11.7@5365,4080 ; C49.2@5265,4600 U18.7@5365,4600 ; C59.2@5265,6360 U4.7@5365,6360 ; C16.2@6120,2920 U39.7@6225,2920 ; C8.2@6125,4080 U15.7@6225,4080 ; C68.2@6125,4600 U19.7@6225,4600 ; C70.2@6125,5160 U14.7@6225,5160
VF: U23.4 U25.6 U26.3 U45.11 | length 3566.6
  TopLayer w10: U25.6@765,5760 765,5548 716,5499 716,4443 757,4402 930,4402 965,4367 U45.11@965,4300 ; U23.4@1825,6360 1974,6211 1974,5912 1925,5863 U26.3@1925,5760
  BottomLayer w10: U25.6@765,5760 813,5712 1877,5712 U26.3@1925,5760
YG: U2.6 U7.2 | length 1187.4
  TopLayer w10: U2.6@4605,6360 4656,6309 4656,6021 4666,6011 4824,6011 4856,6043 4856,6099 4866,6109 5024,6109 5054,6079 5054,5809 U7.2@5005,5760
YT: U2.1 U4.13 U8.6 | length 1510.4
  TopLayer w10: U2.1@5105,6360 5153,6408 5305,6408 5314,6399 5314,6121 ; v1(5413,6121) 5314,6121 ; U8.6@5465,5760 5314,5911 5314,6121
  BottomLayer w10: v1(5413,6121) 5804,6121 U4.13@5865,6060
YTY: U16.13 U58.4 | length 4807.2
  TopLayer w10: v1(3482,2721) 3556,2795 3556,3286 3681,3411 3681,3764 3852,3935 3852,4247 U16.13@3905,4300
  BottomLayer w10: U58.4@965,2920 917,2968 825,2968 816,2959 816,2801 875,2742 2339,2742 2352,2755 2618,2755 2633,2770 2947,2770 2996,2721 v1(3482,2721)
YU: U21.13 U25.12 U42.3 U46.13 U55.4 | length 5104.1
  TopLayer w10: v1(917,3871) 917,3528 U55.4@965,3480 ; U25.12@1065,5460 1065,5660 1115,5710 1115,5885 1165,5935 U21.13@1165,6060 ; v1(1811,5397) 1811,5247 v1(1835,5223) ; U42.3@1925,5160 1976,5109 1976,4295 ; v1(1963,4173) 1976,4186 1976,4295 ; U46.13@2025,4300 1981,4300 1976,4295
  BottomLayer w10: v1(917,3871) 895,3849 785,3849 778,3856 778,3930 784,3936 1011,3936 1056,3891 1314,3891 1363,3940 1375,3940 1450,4015 1638,4015 1673,4050 1673,4166 1680,4173 v1(1963,4173) ; U25.12@1065,5460 1228,5297 1424,5297 1475,5348 1475,5498 1486,5509 1549,5509 1576,5482 1576,5421 1600,5397 v1(1811,5397) ; v1(1835,5223) 1862,5223 U42.3@1925,5160
Z: U29.62 U44.62 | length 4807.9
  TopLayer w10: v1(1976,3986) 1976,4105 2074,4203 2074,5555 2067,5562 v1(2067,5586) ; v1(2551,5609) 2551,5635 v1(2599,5683) ; v1(2588,3967) 2635,3920 2635,3744 v1(2694,3685) ; v1(3121,3661) 3121,3564 U44.62@3205,3480 ; v1(3121,5510) 3121,5455 3153,5423 3153,5212 U29.62@3205,5160
  BottomLayer w10: v1(1976,3986) 1995,3967 v1(2588,3967) ; v1(2067,5586) 2528,5586 v1(2551,5609) ; v1(2599,5683) 2662,5620 3011,5620 v1(3121,5510) ; v1(2694,3685) 2996,3685 3020,3661 v1(3121,3661)
pads on no net: C1.3 C1.4 C1.5 C1.6 C1.7 C1.8 C1.9 C1.10 C1.11 C1.12 C1.13 C1.14 C1.16 C1.17 C1.18 C1.19 C1.20 C1.21 C1.22 C1.23 C1.24 C1.26 C2.2 C2.3 C2.4 C2.5 C2.6 C2.7 C2.8 C2.10 C2.11 C2.12 C2.14 C2.16 C2.18 C2.20 C2.21 C2.22 C2.24 C2.25 C2.26 C4.2 C4.4 C4.5 C4.6 C4.8 C4.10 C4.11 C4.12 C4.13 C4.14 C4.16 C4.17 C4.18 C4.20 C4.21 C4.22 C4.24 C4.25 C4.26 U2.2 U2.8 U2.9 U3.1 U3.2 U3.3 U3.4 U3.8 U4.3 U4.6 U4.8 U4.11 U4.12 U6.1 U6.2 U6.11 U7.3 U7.4 U7.5 U7.6 U7.8 U7.11 U8.8 U8.9 U8.10 U8.11 U8.12 U8.13 U9.2 U9.3 U9.6 U9.8 U9.10 U9.11 U9.12 U9.13 U10.2 U10.3 U10.4 U10.6 U10.8 U10.12 U11.2 U11.10 U11.11 U11.12 U11.13 U12.1 U12.4 U12.5 U12.8 U12.11 U12.12 U13.2 U13.8 U13.9 U13.10 U13.13 U14.8 U14.11 U14.12 U15.1 U15.3 U15.5 U15.8 U15.10 U15.11 U16.1 U16.5 U16.6 U16.8 U16.11 U17.4 U17.5 U17.8 U17.10 U17.11 U18.1 U18.3 U18.4 U18.9 U18.10 U18.11 U18.12 U19.8 U19.9 U19.10 U19.13 U21.2 U21.8 U22.1 U22.4 U22.5 U22.6 U22.8 U22.11 U23.6 U23.8 U23.10 U25.1 U25.3 U25.4 U25.5 U25.8 U25.11 U26.2 U26.10 U26.11 U26.12 U26.13 U27.2 U27.8 U27.10 U28.1 U28.2 U28.3 U28.4 U28.5 U28.13 U28.14 U28.15 U28.21 U28.23 U28.24 U28.31 U28.32 U28.35 U28.36 U28.37 U28.38 U28.40 U28.41 U28.43 U28.44 U28.45 U28.47 U28.48 U28.53 U28.55 U28.57 U28.60 U28.64 U28.68 U29.3 U29.8 U29.11 U29.14 U29.15 U29.17 U29.18 U29.19 U29.21 U29.23 U29.25 U29.26 U29.27 U29.28 U29.30 U29.31 U29.36 U29.40 U29.42 U29.44 U29.47 U29.48 U29.53 U29.54 U29.64 U29.66 U29.68 U31.2 U31.3 U31.4 U31.5 U31.6 U31.7 U31.8 U31.11 U31.14 U32.5 U32.7 U32.8 U32.12 U32.13 U33.1 U33.3 U33.8 U33.11 U33.12 U33.13 U34.1 U34.2 U34.5 U34.6 U34.8 U34.9 U35.3 U35.6 U35.8 U35.11 U35.12 U36.5 U36.6 U36.11 U36.13 U37.1 U37.4 U37.8 U38.1 U38.2 U38.3 U38.4 U38.8 U38.9 U38.11 U38.12 U39.2 U39.3 U39.6 U39.8 U39.10 U39.13 U40.1 U40.4 U40.8 U40.12 U41.1 U41.4 U41.5 U41.6 U41.8 U41.11 U41.12 U41.13 U42.1 U42.2 U42.5 U42.8 U42.9 U42.10 U42.13 U43.1 U43.6 U43.8 U43.9 U43.12 U44.4 U44.6 U44.7 U44.8 U44.10 U44.14 U44.15 U44.17 U44.18 U44.21 U44.23 U44.24 U44.26 U44.28 U44.31 U44.32 U44.35 U44.36 U44.41 U44.42 U44.43 U44.47 U44.54 U44.59 U44.65 U44.66 U44.68 U45.1 U45.2 U45.5 U45.6 U45.8 U46.3 U46.4 U46.6 U46.9 U46.11 U46.12 U47.4 U47.5 U47.8 U47.10 U50.2 U50.4 U50.8 U50.10 U50.11 U50.13 U51.1 U51.3 U51.11 U51.13 U52.5 U52.13 U53.3 U53.8 U53.11 U53.12 U54.3 U54.5 U54.8 U54.13 U55.5 U55.10 U56.1 U56.5 U56.8 U56.9 U56.13 U57.6 U57.8 U57.12 U58.6 U58.9 U58.11 U59.1 U59.3 U59.4 U59.8 U59.9 U59.10 U59.11 U60.2 U60.6 U60.8 U60.9 U60.13

## Keep-outs
KeepOutLayer:
  the board outline again, w35